# Altium PCB Bop_it.PcbDoc
Units mil, origin at the board's own origin, x right, y up, seen from the top; angles counter-clockwise.
Board outline 3205 x 3070 mil, 4 copper layers (Top Layer, Top Mid Layer, Bottom Mid Layer, Bottom Layer), stack 23.756 mil thick; 32 components, 48 nets, 167 pads, 0 vias.
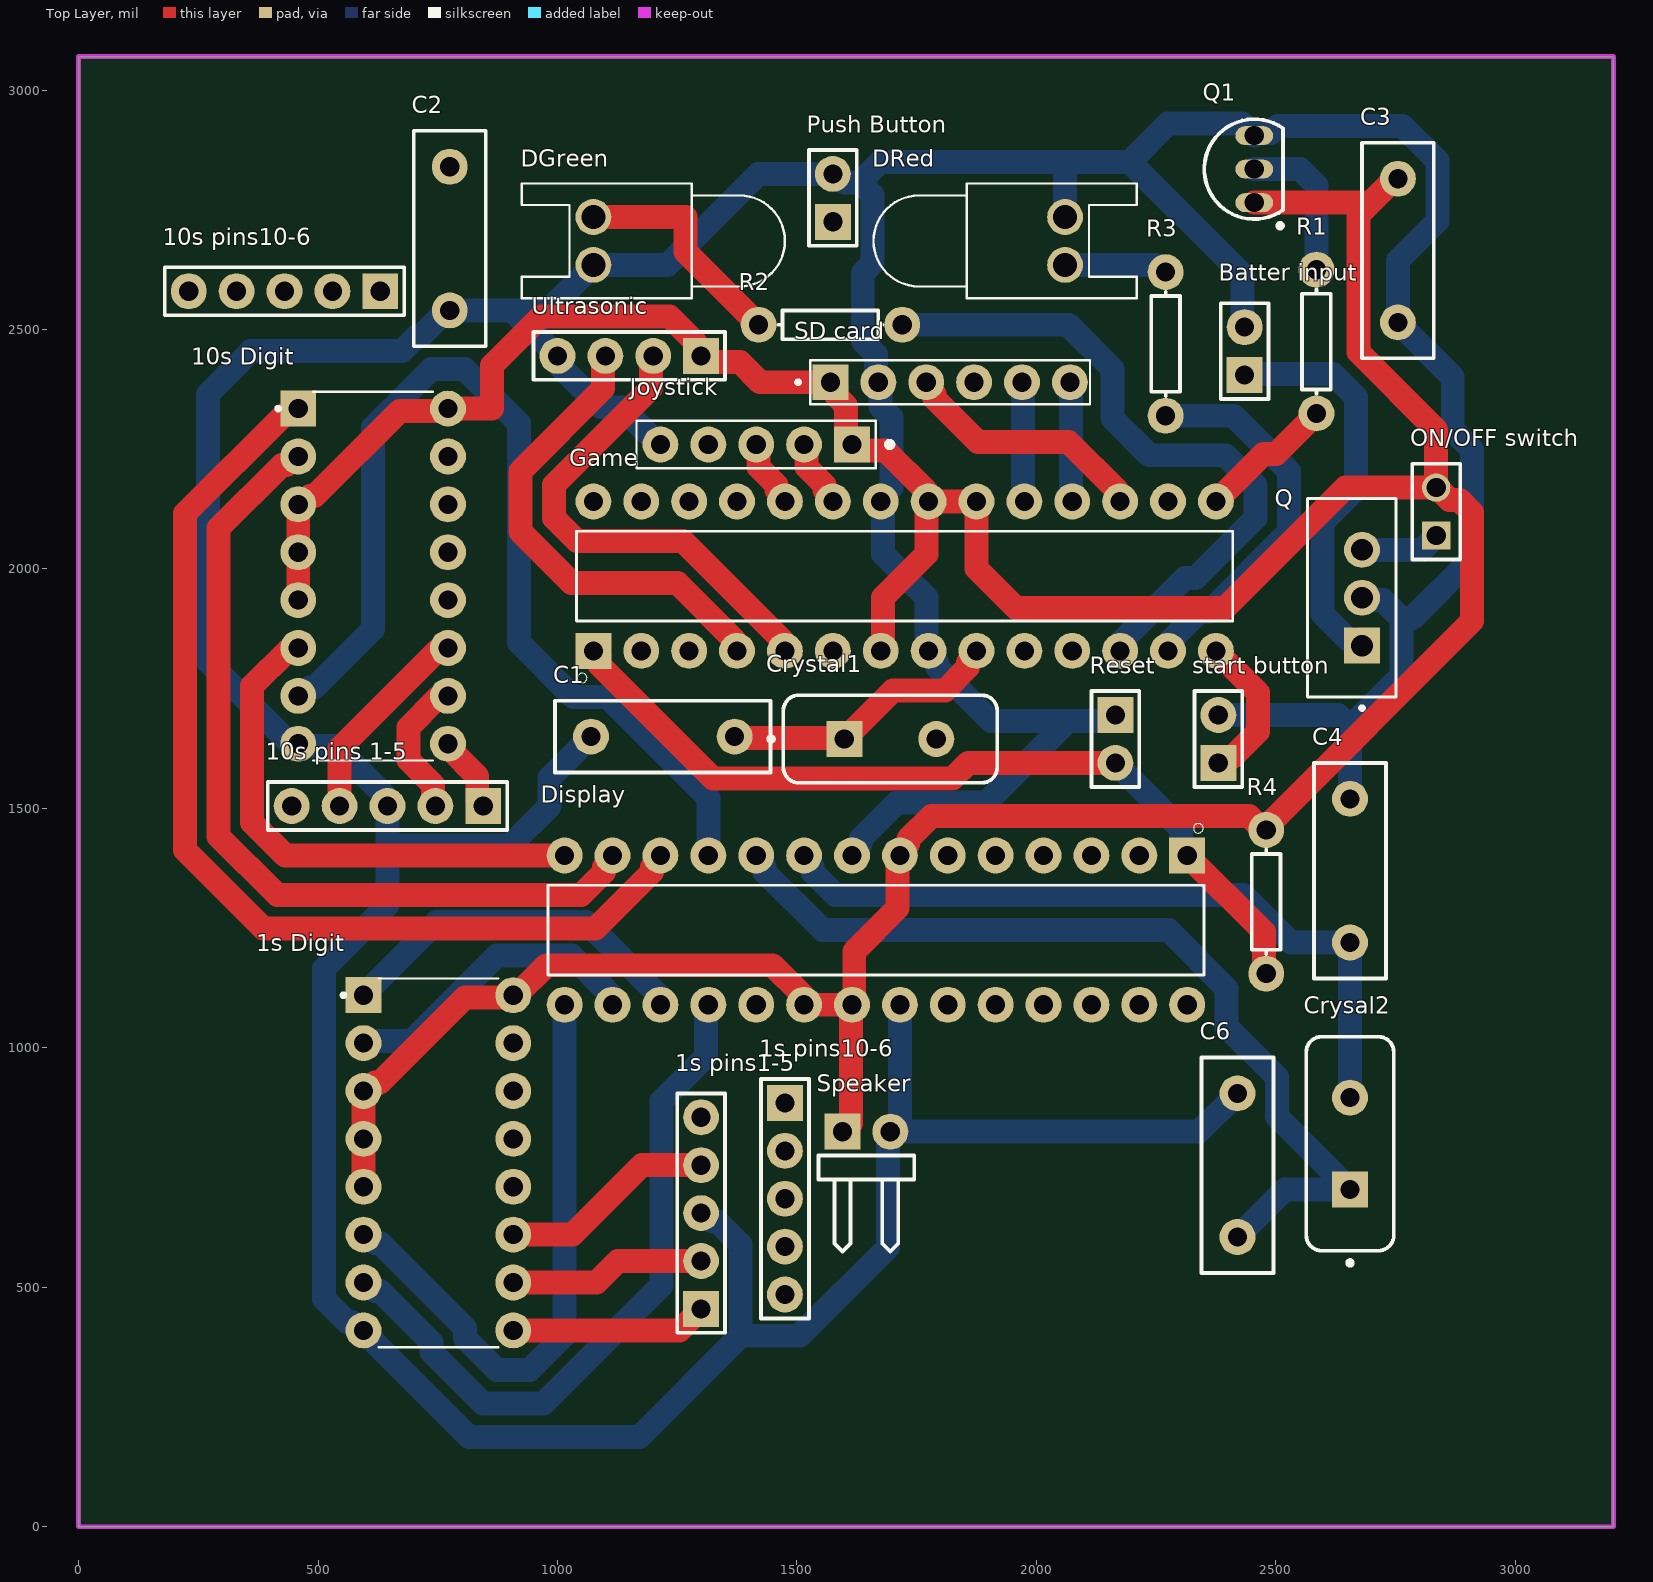
[diagram p0: Top Layer view]
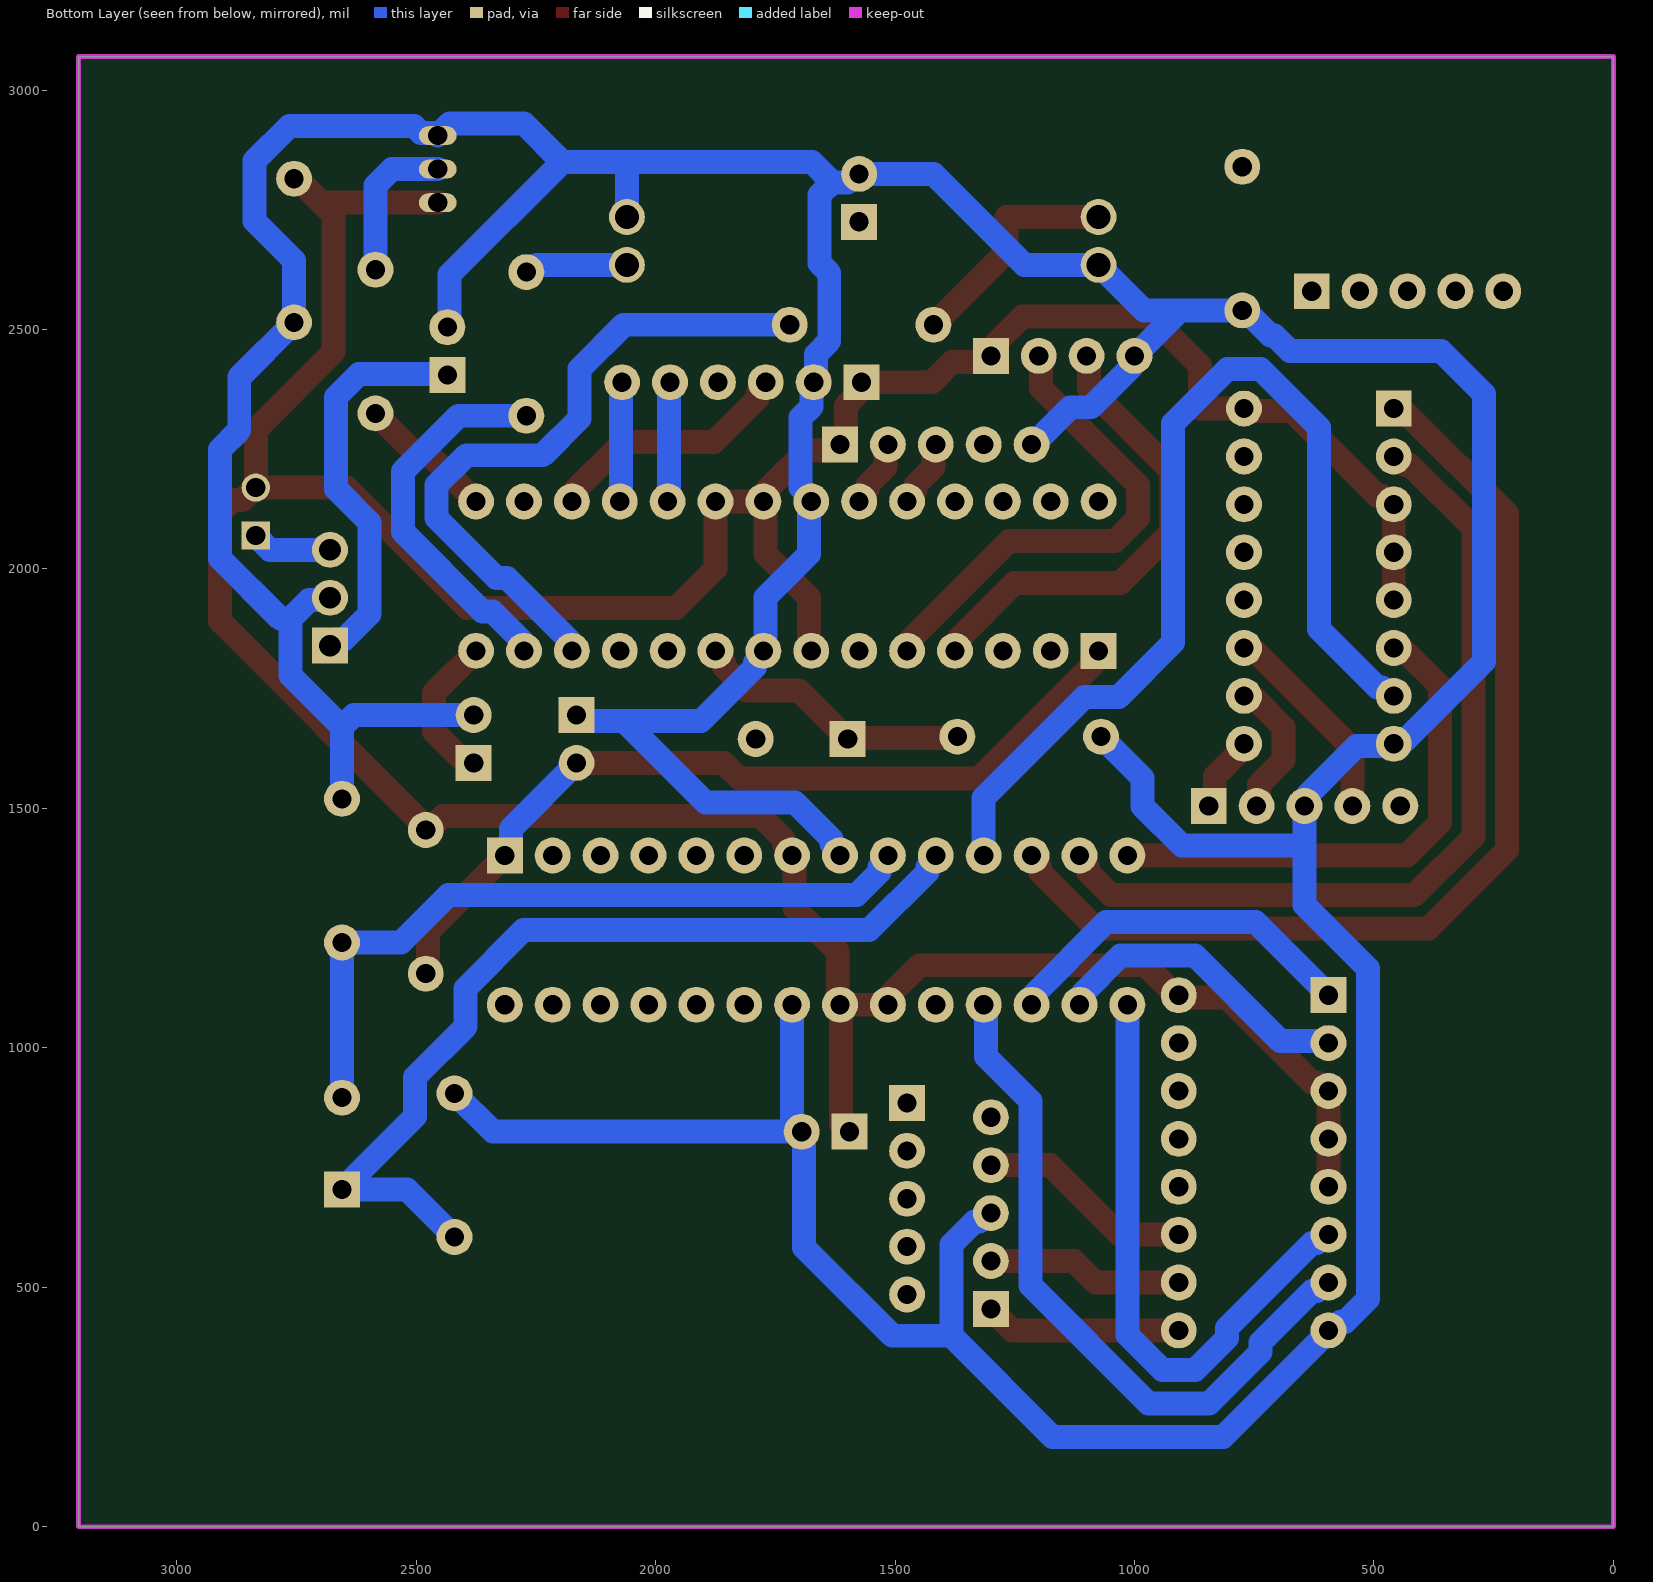
[diagram p1: Bottom Layer view, seen from below]
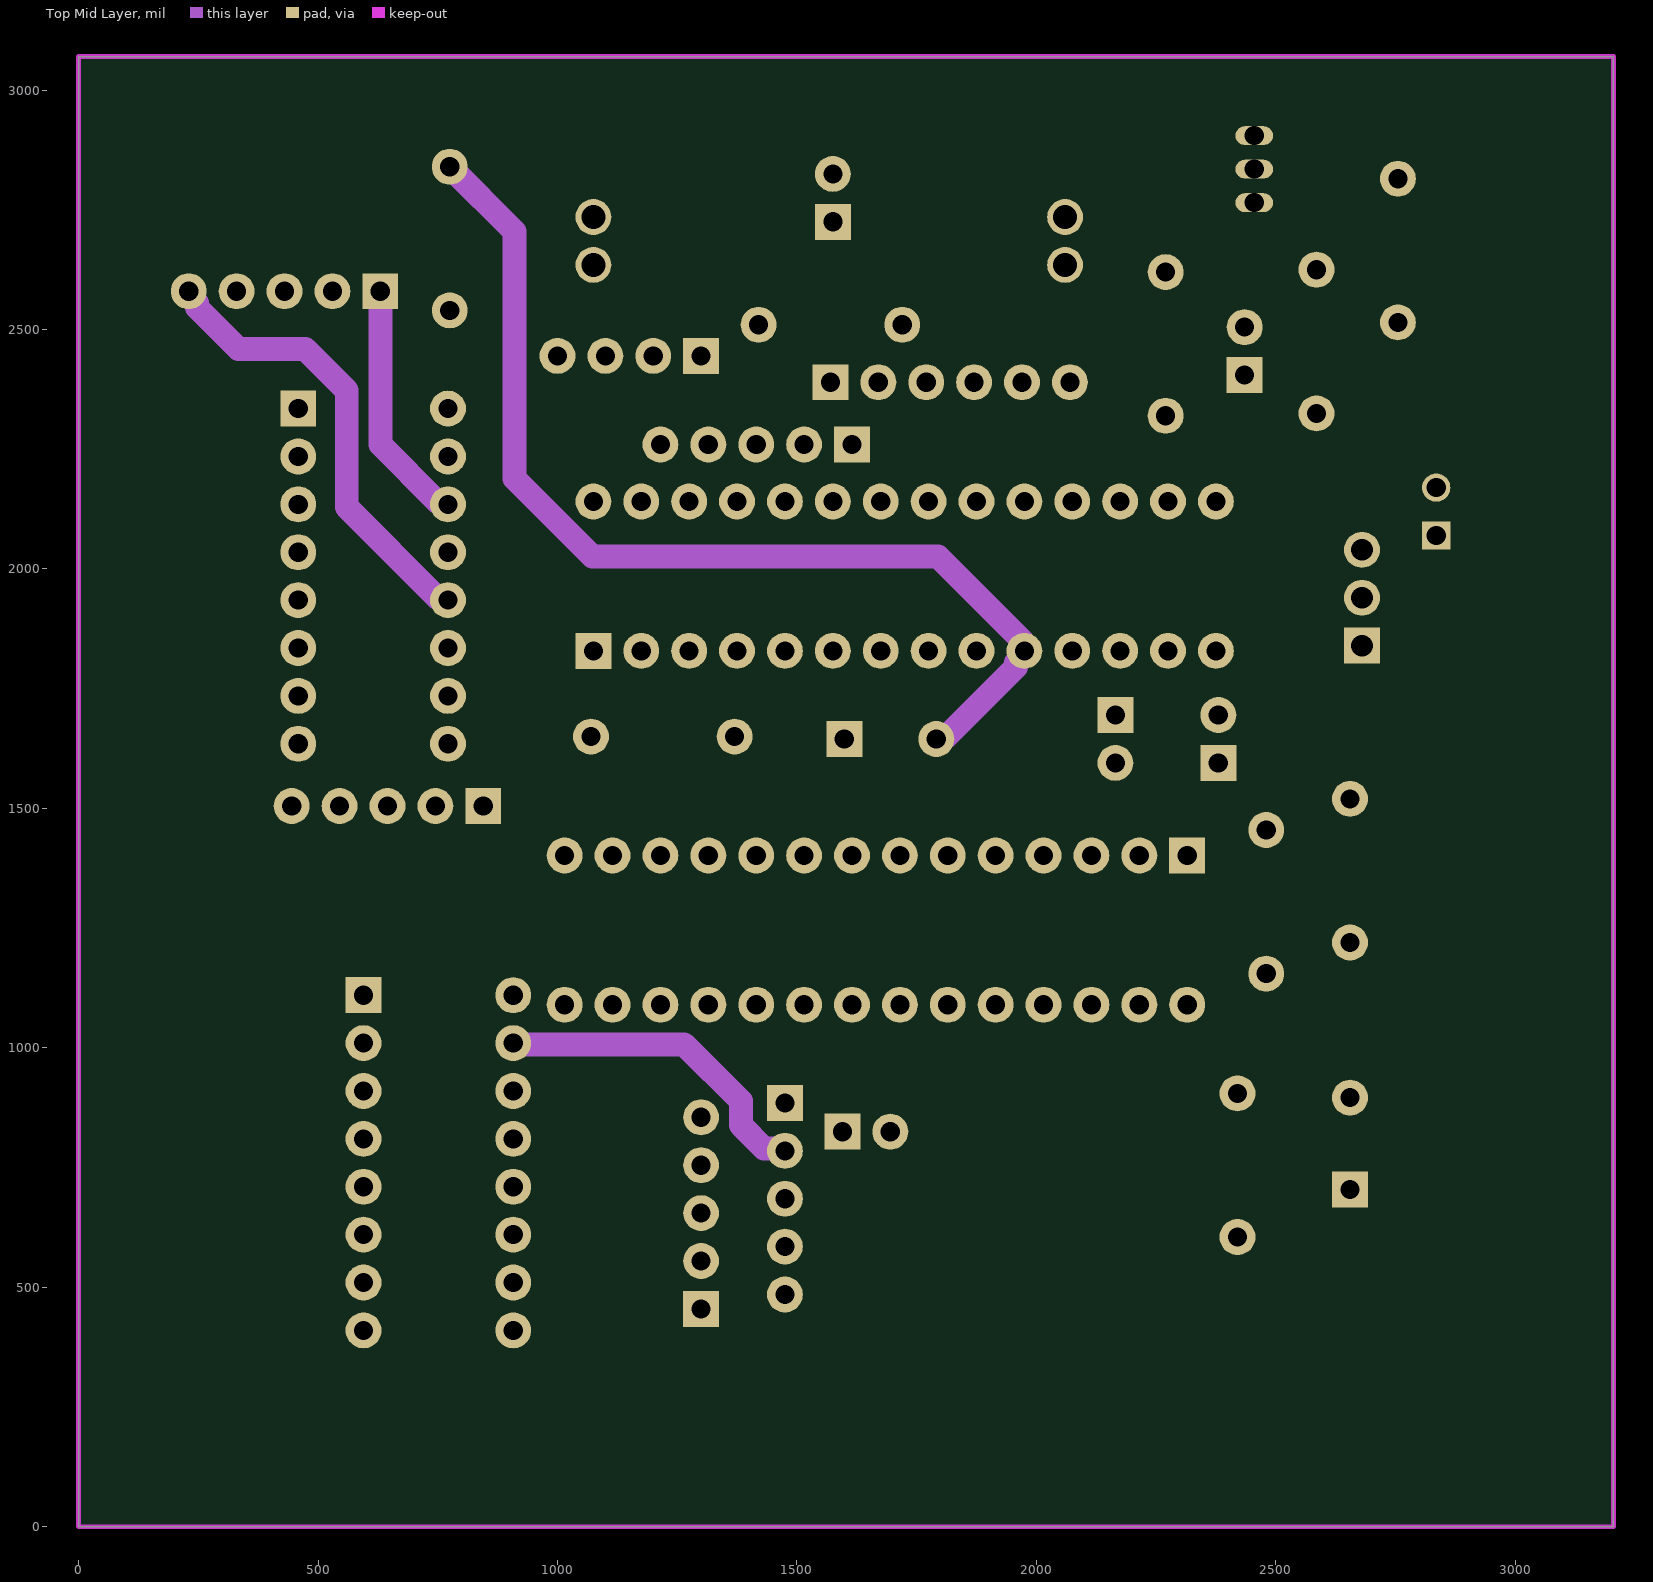
[diagram p2: Top Mid Layer]
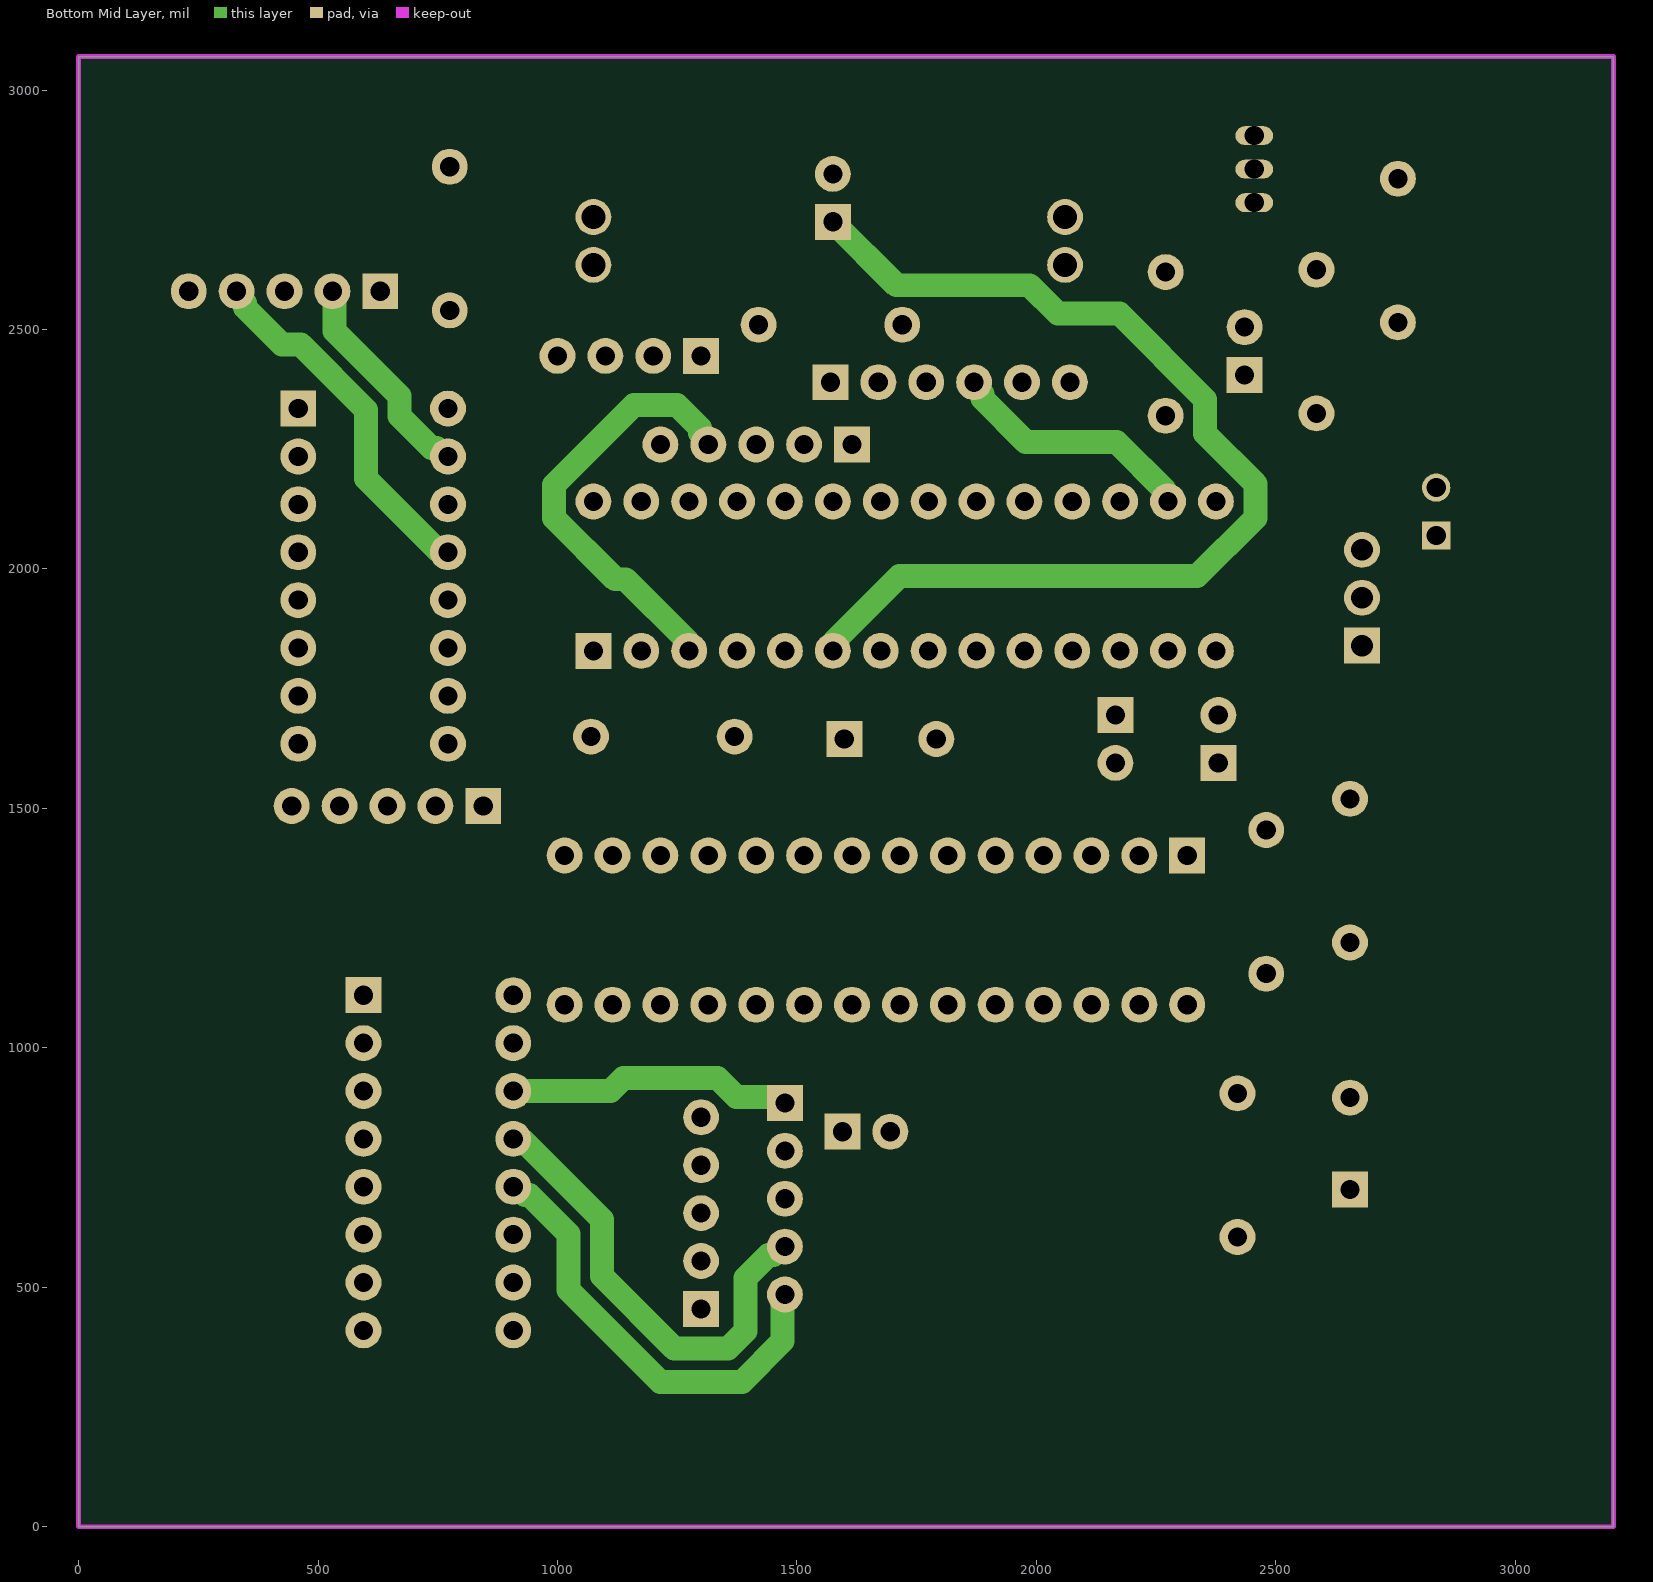
[diagram p3: Bottom Mid Layer]

## Layer stack, top to bottom
Top Solder: solder mask 0.4, Solder Resist, Dk 3.5
Top Layer: signal copper 1.4
Dielectric 2: prepreg 2.8, PP-006, Dk 4.1
Top Mid Layer: signal copper 1.378
Dielectric 1: dielectric 12.6, FR-4, Dk 4.8
Bottom Mid Layer: signal copper 1.378
Dielectric 3: prepreg 2.8, PP-006, Dk 4.1
Bottom Layer: signal copper 1.4
Bottom Solder: solder mask 0.4, Solder Resist, Dk 3.5

## Board outline
0,0 3205,0 3205,3070 0,3070

## Design rules (kind name [scope] priority, off if disabled: settings)
BoardOutlineClearance [All] p1: gap=12 ignorepadtopadclearanceinfootprint=FALSE
Clearance [All] p1: gap=20 ignorepadtopadclearanceinfootprint=TRUE except(24: Arc-Via Track-Via SMDPad-Via THPad-Via Via-Via Via-Fill Via-Poly Via-Region Via-Text Via-Hole)
DiffPairsRouting [All] p1: maxlimit=10 minlimit=7 mostfreqgap=10 toplayer_minwidth=6 toplayer_maxwidth=15 toplayer_prefwidth=8 midlayer1_mingap=10 midlayer1_minwidth=15 midlayer1_maxwidth=15 midlayer1_prefwidth=15 midlayer2_mingap=10 midlayer2_minwidth=15 midlayer2_maxwidth=15 midlayer2_prefwidth=15 bottomlayer_minwidth=6 bottomlayer_maxwidth=15 bottomlayer_prefwidth=8 maxuncoupledlength=500
HoleSize [All] p1: absolutevalues=TRUE maxlimit=1000 minlimit=39.37 maxpercent=80.000 minpercent=20.000
HoleToHoleClearance [All] p1: gap=17 allowstackedmicrovias=TRUE
PolygonConnect [All] p1: connectstyle=Relief reliefconductorwidth=10 reliefentries=4 polygonreliefangle="90 Angle" airgapwidth=10
RoutingVias [All] p1: holewidth=30 width=35 viastyle="Through Hole" minholewidth=10 minwidth=11 maxholewidth=255 maxwidth=250
SilkToSilkClearance [All] p1: silktosilkclearance=0
SolderMaskExpansion SolderMaskExpansion_1 [All] p1: expansion=4 istentingtop=FALSE
Width [All] p1: maxlimit=10000 minlimit=30 preferedwidth=50 minimp=50.000000 maximp=50.000000 favimp=50.000000
26 further rules are at their usual default settings.

## Components (designator, comment, footprint, x,y, rotation, side; value= is the part's Value field where it differs from the comment)
"1s Digit" "SN74LS247N" DIP794W45P254L1969H508Q16 751.3,760 r0 top
"1s pins1-5" "Header 5" HDR1X5 1300,455 r90 top
"1s pins10-6" "Header 5" HDR1X5 1475,885 r270 top
"10s Digit" "SN74LS247N" DIP794W45P254L1969H508Q16 615,1985 r0 top
"10s pins10-6" "Header 5" HDR1X5 630,2580 r180 top
"10s pins 1-5" "Header 5" HDR1X5 845,1505 r180 top
"Batter input" "Header 2" HDR1X2#1 2435,2405 r90 top
C1 "C1" RAD-0.3 1220,1650 r0 top value=22pF
C2 "C2" RAD-0.3 775,2690 r90 top value=22pF
C3 "Cap" RAD-0.3 2755,2665 r90 top value=10uF
C4 "C1" RAD-0.3 2655,1370 r90 top value=22pF
C6 "C5" RAD-0.3 2420,755 r90 top value=22pF
Crysal2 "FOXSLF/160-20" FOX-FOXSLF160-20 2655,800 r90 top
Crystal1 "FOXSLF/160-20" FOX-FOXSLF160-20 1695,1645 r0 top
DGreen "LED0" LED-0 1075,2685 r90 top
Display "ATMEGA328P-PU" DIP794W46P254L2967H457Q28B 1665,1245.91 r270 top
DRed "LED0" LED-0 2060,2685 r270 top
Game "ATMEGA328P-PU" DIP794W46P254L2967H457Q28B 1725,1985 r90 top
Joystick "Joystick" TE_826629-5 1615,2260 r180 top
"ON/OFF switch" "Header 2" HDR1X2#2 2835,2070 r90 top
"Push Button" "Header 2" HDR1X2#1 1575,2725 r90 top
Q "LM7805CT/NOPB" TO254P1054X470X2600-3 2680,1840 r90 top
Q1 "NPN" TO-226-AA 2455,2835 r0 top
R1 "Res1" AXIAL-0.3 2585,2475 r90 top value=n/a
R2 "Res1" AXIAL-0.3 1570,2510 r0 top value=1.2k
R3 "Res1" AXIAL-0.3 2270,2470 r270 top value=1.2k
R4 "Res1" AXIAL-0.3 2480,1305 r90 top value=10K
Reset "Header 2" HDR1X2#1 2165,1695 r270 top
"SD card" "SD Card Reader" TE_5-146285-6 1570,2390 r0 top
Speaker "Header 2H" HDR1X2H 1595,825 r0 top
"start button" "Header 2" HDR1X2#1 2380,1595 r90 top
Ultrasonic "Ultrasonic sensor" HDR1X4 1300,2445 r180 top

## Footprints (in the part's own frame and the unit in brackets; to place one, negate y for a bottom-side part, rotate by r counter-clockwise, add the part's x,y. Pads: shape width x height; smd on the part's side, far side on the other; paste and mask are expansions set on the pad)
AXIAL-0.3 [mil] "Axial Device, Thru-Hole; 2 Leads; 0.3 in Pin Spacing"
  round 75 hole 40: 1(-150,0) 2(150,0)
  silkscreen extent -109,-30 109,30
DIP794W45P254L1969H508Q16 [mil]
  rect 75x75 hole 40: 1(-156.3,350)
  round 75 hole 40: 2(-156.3,250) 3(-156.3,150) 4(-156.3,50) 5(-156.3,-50) 6(-156.3,-150) 7(-156.3,-250) 8(-156.3,-350) 9(156.3,-350) 10(156.3,-250) 11(156.3,-150) 12(156.3,-50) 13(156.3,50) 14(156.3,150) 15(156.3,250) 16(156.3,350)
  silkscreen extent -202,-385 125,385, body extent -380,-215 380,215, height 200
DIP794W46P254L2967H457Q28B [mil]
  rect 75x75 hole 40: 1(-155.91,650)
  round 75 hole 40: 2(-155.91,550) 3(-155.91,450) 4(-155.91,350) 5(-155.91,250) 6(-155.91,150) 7(-155.91,50) 8(-155.91,-50) 9(-155.91,-150) 10(-155.91,-250) 11(-155.91,-350) 12(-155.91,-450) 13(-155.91,-550) 14(-155.91,-650) 15(155.91,-650) 16(155.91,-550) 17(155.91,-450) 18(155.91,-350) 19(155.91,-250) 20(155.91,-150) 21(155.91,-50) 22(155.91,50) 23(155.91,150) 24(155.91,250) 25(155.91,350) 26(155.91,450) 27(155.91,550) 28(155.91,650)
  silkscreen extent -223,-685 94,685
FOX-FOXSLF160-20 [mil] "THD, 2-Leads, Body 11.35x4.65mm"
  rect 75x75 hole 40: 1(-96.06,0)
  round 75 hole 40: 2(96.06,0)
  silkscreen extent -254,-92 223,92, body extent -223,-92 223,92, height 142
HDR1X2#1 [mil] "Connector; Header; 2 Position"
  rect 75x75 hole 40: 1(0,0)
  round 75 hole 40: 2(100,0)
  silkscreen extent -50,-50 150,50
HDR1X2#2 [mil] "Connector; Header; 2 Position"
  rect 59.06x59.06 hole 40: 1(0,0)
  round 59.06 hole 40: 2(100,0)
  silkscreen extent -50,-50 150,50
HDR1X2H [mil] "Connector; Header; 2 Position; Right Angle"
  rect 75x75 hole 40: 1(0,0)
  round 75 hole 40: 2(100,0)
  silkscreen extent -50,-250 150,-50
HDR1X4 [mil] "Connector; Header; 4 Position"
  rect 75x75 hole 40: 1(0,0)
  round 75 hole 40: 2(100,0) 3(200,0) 4(300,0)
  silkscreen extent -50,-50 350,50
HDR1X5 [mil] "Connector; Header; 5 Position"
  rect 75x75 hole 40: 1(0,0)
  round 75 hole 40: 2(100,0) 3(200,0) 4(300,0) 5(400,0)
  silkscreen extent -50,-50 450,50
LED-0 [mil] "LED; 2 Leads"
  round 75 hole 50: 1(50,0) 2(-50,0)
  silkscreen extent -120,-400 120,150
RAD-0.3 [mil] "Radial Cap, Thru-Hole; 2 Leads; 0.3 in Pin Spacing"
  round 75 hole 40: 1(-150,0) 2(150,0)
  silkscreen extent -225,-75 225,75
TE_5-146285-6 [mil]
  rect 75x75 hole 40: 1(0,0)
  round 75 hole 40: 2(100,0) 3(200,0) 4(300,0) 5(400,0) 6(500,0)
  silkscreen extent -72,-46 542,46
TE_826629-5 [mil]
  rect 75x75 hole 40: 1(0,0)
  round 75 hole 40: 2(100,0) 3(200,0) 4(300,0) 5(400,0)
  silkscreen extent -85,-49 450,49
TO254P1054X470X2600-3 [mil]
  rect 75x75 hole 45: 1(0,0)
  round 75 hole 45: 2(100,0) 3(200,0)
  silkscreen extent -134,-71 307,114
TO-226-AA [mm] "TO, Flat Index; 3 In-Line, Axial Leads; Body Dia. 4.8mm; Leads 0.55 x 0.51 mm (max)"
  oval 2x1 hole 1.016: 1(0,-1.778) 2(0,0) 3(0,1.778)
  silkscreen extent -2.65,-3.13 1.52,2.65, body extent -2.65,-2.66 1.52,2.66, height 5.33

## Part data
"1s Digit" "10s Digit": "BCD-To-Seven-Segment Decoders/Drivers 16-PDIP 0 to 70", Package="PDIP-16 Texas Instruments", Check_prices=https://www.snapeda.com/parts/SN74LS247N/Texas%20Instruments/view-part/230215/?ref=eda, Digi-Key_Part_Number=296-28943-2-ND, MF="Texas Instruments", MP=SN74LS247N, Purchase-URL=https://pricing.snapeda.com/search/part/SN74LS247N/?ref=eda, SnapEDA_Link=https://www.snapeda.com/parts/SN74LS247N/Texas%20Instruments/view-part/230215/?ref=snap
"1s pins1-5" "1s pins10-6" "10s pins10-6" "10s pins 1-5": "Header, 5-Pin", LatestRevisionDate=17-Jul-2002, LatestRevisionNote="Re-released for DXP Platform.", Publisher="Altium Limited"
"Batter input" "ON/OFF switch" "Push Button" Reset "start button": "Header, 2-Pin", LatestRevisionDate=17-Jul-2002, LatestRevisionNote="Re-released for DXP Platform.", Publisher="Altium Limited"
C1 C2 C4 C6: library part Cap, "Capacitor", LatestRevisionDate=17-Jul-2002, LatestRevisionNote="Re-released for DXP Platform.", PackageDescription="Radial Cap, Thru-Hole; 2 Leads; 0.3 in Pin Spacing", PackageReference=RAD-0.3, Published=8-Jun-2000, Publisher="Altium Limited"
C3: "Capacitor", LatestRevisionDate=17-Jul-2002, LatestRevisionNote="Re-released for DXP Platform.", PackageDescription="Radial Cap, Thru-Hole; 2 Leads; 0.3 in Pin Spacing", PackageReference=RAD-0.3, Published=8-Jun-2000, Publisher="Altium Limited"
Crysal2 Crystal1: library part CMP-1749-00003-1, "Resistance Weld Thru-Hole Crystal, 16 MHz, -20 to 70 degC, 2-Pin THD, RoHS, Bulk", Case\Package=Axial, Max Operating Temperature="155 degC", Min Operating Temperature="-55 degC", Package Quantity=200, Power Rating="250 mW", Resistance="221 kohm", Tolerance=1%, Voltage Rating="250 V", ComponentLink1Description="Manufacturer URL", ComponentLink1URL=http://www.foxonline.com/, ComponentLink2Description=Datasheet, ComponentLink2URL=http://www.foxonline.com/pdfs/hc49slf.pdf, DatasheetVersion=Mar-15, Length="0.248 inch", Mount="Through Hole", PackageDescription="2-Pin Through Hole Device, Body 11.35 x 4.65 mm", PackageReference=FOXSLF160-20, Packaging=Bulk, RoHSCompliant=true
DGreen DRed: "Typical INFRARED GaAs LED", LatestRevisionDate=08-Jul-2005, LatestRevisionNote="Mech Layer 1 removed.", PackageDescription="LED; 2 Leads", PackageReference=LED-0, Published=8-Jun-2000, Publisher="Altium Limited"
Display Game: "AVR AVRÂ® ATmega Microcontroller IC 8-Bit 20MHz 32KB _16K x 16_ FLASH 28-PDIP", Package="PDIP-28 Atmel", Availability=Unavailable, MF=Microchip, MP=ATMEGA328P-PU, Price=None, SnapEDA_Link=https://www.snapeda.com/parts/ATMEGA328P-PU/Microchip/view-part/44282/?ref=snap
Joystick: library part 826629-5, "Board-To-Board Connector, AMPMODU MOD II Series, Through Hole, Header, 5, 2.54 mm", Package=None, Availability=Unavailable, Centerline_Pitch="2.54 mm[.1 in]", EU_RoHS_Compliance=Compliant, MF="TE Connectivity", MP=826629-5, Number_of_Positions=5, Price=None, Product_Type=Connector, SnapEDA_Link=https://www.snapeda.com/parts/826629-5/TE%20Connectivity%20AMP%20Connectors/view-part/905319/?ref=snap, TE_purchase_URL=https://www.te.com/usa-en/product-826629-5.html?te_bu=Cor&te_type=disp&te_campaign=seda_glo_cor-seda-global-disp-prtnr-fy19-seda-model-bom-cta_sma-317_1&elqCampaignId=32493
Q: "Linear Voltage Regulator IC 1 Output 1A TO-220-3", Package="TO-220 ON Semiconductor", Availability=Unavailable, MF="ON Semiconductor", MP=LM7805CT, Price=None, SnapEDA_Link=https://www.snapeda.com/parts/LM7805CT/ON%20Semiconductor/view-part/546231/?ref=snap
Q1: "NPN Bipolar Transistor", Code_JEDEC=TO-226-AA, LatestRevisionDate=17-Jul-2002, LatestRevisionNote="Re-released for DXP Platform.", PackageDescription="TO, Flat Index; 3 In-Line, Axial Leads; Body Dia. 4.8mm; Leads 0.55 x 0.51 mm (max)", PackageReference=TO-226-AA, Published=8-Jun-2000, Publisher="Altium Limited"
R1 R2 R3 R4: "Resistor", LatestRevisionDate=17-Jul-2002, LatestRevisionNote="Re-released for DXP Platform.", PackageDescription="Axial Device, Thru-Hole; 2 Leads; 0.3 in Pin Spacing", PackageReference=AXIAL-0.3, Published=8-Jun-2000, Publisher="Altium Limited"
"SD card": library part 5-146285-6, "Connector Header Through Hole 6 position 0.100 (2.54mm)", Package=None, Digi-Key_Part_Number=A122872-ND, DigiKey-Purchase-URL=https://snapeda.com/shop?store=DigiKey&id=2411669, EU_RoHS_Compliance=Compliant, MF="TE Connectivity", MP=5-146285-6, SnapEDA_Link=https://www.snapeda.com/parts/5-146285-6/TE%20Connectivity%20AMP%20Connectors/view-part/2411669/?ref=snap
Speaker: "Header, 2-Pin, Right Angle", LatestRevisionDate=17-Jul-2002, LatestRevisionNote="Re-released for DXP Platform.", Publisher="Altium Limited"
Ultrasonic: library part "Header 4", "Header, 4-Pin", LatestRevisionDate=17-Jul-2002, LatestRevisionNote="Re-released for DXP Platform.", Publisher="Altium Limited"

## Nets (pads, with @x,y where several pads share a name; then routed paths per layer and width w, separated by ;. In a path a pad name is that pad's centre, name@x,y a point inside that pad or via, vN(x,y) a via of type N, cw(c..) or ccw(c..) an arc to the next point about the centre after c; other vN are vias at no path point)
Bit0: "10s Digit.7" Display.11 | length 2144.4
  Bottom Layer w50: 458.7,1735 465.47,1735 482.97,1752.5 492.87,1752.5 615,1874.63 615,2295.37 737.13,2417.5 805.47,2417.5 919.21,2303.76 919.21,1846.24 1032.95,1732.5 1104.17,1732.5 1315,1521.67 Display.11
Bit1: "10s Digit.1" Display.12 | length 2162.9
  Top Layer w50: 458.7,2335 446.2,2322.5 429.53,2322.5 222.5,2115.47 222.5,1412.84 386.03,1249.31 1079.17,1249.31 1197.5,1367.64 1197.5,1377.55 1215,1395.05 Display.12
Bit2: "10s Digit.2" Display.13 | length 1789
  Top Layer w50: 458.7,2235 451.94,2235 434.44,2217.5 424.53,2217.5 292.5,2085.47 292.5,1441.83 415.02,1319.31 1049.17,1319.31 1097.5,1367.64 1097.5,1377.55 1115,1395.05 Display.13
bit3: "10s Digit.6" Display.14 | length 1094.9
  Top Layer w50: 458.7,1835 453.92,1830.22 437.24,1830.22 362.5,1755.47 362.5,1470.83 431.52,1401.81 Display.14
CorrectSignal: Game.12 R2.2 | length 1412.4
  Bottom Layer w50: R2.2 2066.67,2510 2158.64,2418.03 2158.64,2314.69 2235.83,2237.5 2395.08,2237.5 2457.5,2175.08 2457.5,2106.73 2332.36,1981.59 2310.83,1981.59 2179.78,1850.55 2179.78,1833.88 Game.12
gnd: "1s Digit.8" "1s pins1-5.3" "10s Digit.8" "10s pins 1-5.3" "Batter input.2" "Push Button.2" "SD card.2" "start button.2" C1.1 C2.1 C3.1 C4.2 C6.2 DGreen.2 Display.8 Display.22 DRed.2 Game.8 Game.22 Joystick.5 Q1.3 Q.2 Reset.1 Speaker.2 Ultrasonic.4 | length 13627.7
  Bottom Layer w50: C1.1 983.18,1563.18 983.18,1504.54 901.14,1422.5 657.5,1422.5 645,1435 ; Joystick.5 1211.51,2260 1133.71,2337.81 1090.52,2337.81 1004.78,2423.54 1004.78,2440.22 Ultrasonic.4 904.78,2540.22 ; 1300,655 1306.76,655 1324.26,637.5 1334.17,637.5 1382.5,589.17 1382.5,398.86 ; Display.8 1615,1408.58 1632.5,1426.08 1632.5,1435.98 1709.02,1512.5 1896.14,1512.5 2066.14,1682.5 ; Speaker.2@1715,851.76 Display.22 ; DRed.2 2060,2850 ; Reset.1 2152.5,1682.5 2066.14,1682.5 ; 2380,1695 2630.2,1695 2655,1670.2 ; C6.2 2340,825 Speaker.2 1690.22,820.22 1690.22,583.54 1505.53,398.86 1382.5,398.86 ; 2435,2505 2430.22,2509.78 2430.22,2614.78 2195,2850 ; C4.2 2655,1670.2 ; Q.2 2684.78,1935.22 2723.42,1935.22 2762.5,1896.14 ; 645,1435 645,1505 640.22,1509.78 640.22,1526.46 536.46,1630.22 463.48,1630.22 458.7,1635 453.92,1639.78 437.24,1639.78 270,1807.03 270,2365 360,2455 675.55,2455 708.05,2487.5 715.73,2487.5 773.24,2545 780,2545 784.78,2540.22 904.78,2540.22 ; 645,1435 645,1298.64 512.5,1166.14 512.5,475.83 560.83,427.5 570.74,427.5 588.24,410 595,410 595,407.94 815.44,187.5 1171.14,187.5 1382.5,398.86 ; 904.78,2540.22 980.22,2540.22 DGreen.2 1230,2635 1420,2825 1575,2825 1581.76,2825 1599.26,2807.5 1631.14,2807.5 ; 1631.14,2807.5 1657.5,2781.14 1657.5,2638.48 1637.5,2618.48 1637.5,2475.83 1665.22,2448.11 1665.22,2394.78 1670,2390 1674.78,2385.22 1674.78,2338.86 1697.5,2316.14 1697.5,2170.17 1675,2147.67 Game.22 1679.78,2136.12 1679.78,2031.08 1770.22,1940.64 1770.22,1833.88 Game.8 1775,1822.33 1792.5,1804.83 1792.5,1794.92 1904.92,1682.5 2066.14,1682.5 ; 1631.14,2807.5 1673.64,2850 2060,2850 ; 2060,2850 2195,2850 ; 2195,2850 2275,2930 2430,2930 Q1.3 2460.32,2910.32 2490.32,2910.32 2505,2925 2765,2925 2837.5,2852.5 2837.5,2726.72 2755,2644.22 C3.1 2869.53,2400.47 2869.53,2289.8 2909.53,2249.8 2909.53,2021.83 2783.83,1896.14 2762.5,1896.14 ; 2655,1670.2 2762.5,1777.7 2762.5,1896.14
IncorrectSignal: Game.13 R3.2 | length 803.9
  Bottom Layer w50: R3.2@2274.78,2315.22 R3.2 2411.57,2320 2527.5,2204.07 2527.5,2077.74 2361.36,1911.59 2340.83,1911.59 2279.78,1850.55 2279.78,1833.88 Game.13
MISO: "SD card.6" Game.18 | length 251.2
  Bottom Layer w50: 2070,2390 2072.5,2387.5 2072.5,2143.41 Game.18
MOSI: "SD card.3" Game.17 | length 527.7
  Top Layer w50: 1770,2390 1770,2383.24 1787.5,2365.74 1787.5,2355.83 1877.87,2265.45 2067.13,2265.45 2170.22,2162.36 2170.22,2145.69 Game.17
"Net1s Digit_1": "1s Digit.1" Display.17 | length 764.4
  Bottom Layer w50: 595,1110 747.5,1262.5 1059.17,1262.5 1210.22,1111.46 1210.22,1094.78 Display.17
"Net1s Digit_2": "1s Digit.2" Display.16 | length 647.8
  Bottom Layer w50: 595,1010 599.78,1014.78 695.71,1014.78 873.43,1192.5 1029.17,1192.5 1110.22,1111.46 1110.22,1094.78 Display.16
"Net1s Digit_6": "1s Digit.6" Display.15 | length 1268.8
  Bottom Layer w50: 595,610 601.76,610 619.26,592.5 629.17,592.5 806.8,414.87 806.8,394.12 873.43,327.5 941.77,327.5 1015,400.73 Display.15
"Net1s Digit_7": "1s Digit.7" Display.18 | length 1467
  Bottom Layer w50: 595,510 601.76,510 619.26,492.5 629.17,492.5 736.8,384.87 736.8,365.13 844.43,257.5 970.77,257.5 1217.5,504.23 1217.5,889.17 1310.22,981.89 1310.22,1085.22 Display.18
"Net1s Digit_9": "1s Digit.9" "1s pins1-5.1" | length 411
  Top Layer w50: 907.6,410 1255,410 1300,455
"Net1s Digit_10": "1s Digit.10" "1s pins1-5.2" | length 411
  Top Layer w50: 907.6,510 1081.3,510 1126.3,555 1300,555
"Net1s Digit_11": "1s Digit.11" "1s pins1-5.4" | length 452.5
  Top Layer w50: 907.6,610 1031.3,610 1176.3,755 1300,755
"Net1s Digit_12": "1s Digit.12" "1s pins10-6.5" | length 934.5
  Bottom Mid Layer w50: 907.6,710 914.36,710 931.86,692.5 941.77,692.5 1022.82,611.46 1022.82,494.55 1214.87,302.5 1385.13,302.5 1470.22,387.58 1470.22,480.22 1475,485
"Net1s Digit_13": "1s Digit.13" "1s pins10-6.4" | length 970.3
  Bottom Mid Layer w50: 907.6,810 912.38,805.22 929.05,805.22 1092.82,641.46 1092.82,523.54 1243.86,372.5 1356.14,372.5 1392.5,408.86 1392.5,519.17 1440.83,567.5 1450.74,567.5 1468.24,585 1475,585
"Net1s Digit_14": "1s Digit.14" "1s pins10-6.1" | length 600.5
  Bottom Mid Layer w50: 907.6,910 1110.52,910 1138.02,937.5 1334.17,937.5 1374.17,897.5 1462.5,897.5 1475,885
"Net1s Digit_15": "1s Digit.15" "1s pins10-6.2" | length 690.1
  Top Mid Layer w50: 907.6,1010 910.1,1007.5 1264.17,1007.5 1382.87,888.8 1382.87,838.49 1431.58,789.78 1470.22,789.78 1475,785
"Net10s Digit_9": "10s Digit.9" "10s pins 1-5.1" | length 160.5
  Top Layer w50: 771.3,1635 771.3,1628.24 832.5,1567.03 832.5,1517.5 845,1505
"Net10s Digit_10": "10s Digit.10" "10s pins 1-5.2" | length 297.2
  Top Layer w50: 745,1505 740.22,1509.78 740.22,1549.41 688.8,1600.83 688.8,1669.17 749.84,1730.22 766.52,1730.22 771.3,1735
"Net10s Digit_11": "10s Digit.11" "10s pins 1-5.4" | length 433.5
  Top Layer w50: 545,1505 545,1625.37 749.84,1830.22 766.52,1830.22 771.3,1835
"Net10s Digit_12": "10s Digit.12" "10s pins10-6.5" | length 960.4
  Top Mid Layer w50: 230,2580 230,2573.24 247.5,2555.74 247.5,2545.83 334.24,2459.08 473.26,2459.08 560,2372.34 560,2129.63 749.84,1939.78 766.52,1939.78 771.3,1935
"Net10s Digit_13": "10s Digit.13" "10s pins10-6.4" | length 760.4
  Bottom Mid Layer w50: 330,2580 330,2573.24 347.5,2555.74 347.5,2545.83 424.84,2468.48 463.86,2468.48 600.49,2331.85 600.49,2189.13 749.84,2039.78 766.52,2039.78 771.3,2035
"Net10s Digit_14": "10s Digit.14" "10s pins10-6.1" | length 513.3
  Top Mid Layer w50: 630,2580 630,2259.63 749.84,2139.78 766.52,2139.78 771.3,2135
"Net10s Digit_15": "10s Digit.15" "10s pins10-6.2" | length 454.7
  Bottom Mid Layer w50: 530,2580 534.78,2575.22 534.78,2496.55 670.49,2360.84 670.49,2319.13 737.13,2252.5 747.03,2252.5 764.53,2235 771.3,2235
"NetBatter input_1": "Batter input.1" Q.1 | length 845.7
  Bottom Layer w50: 2435,2405 2437.5,2407.5 2619.17,2407.5 2667.5,2359.17 2667.5,2167.5 2597.5,2097.5 2597.5,1905.83 2650.83,1852.5 2667.5,1852.5 Q.1
NetC1_2: C1.2 Crystal1.1 Game.9 | length 593.1
  Top Layer w50: C1.2 1372.5,1647.5 1596.44,1647.5 Crystal1.1 1700.53,1746.59 1809.17,1746.59 1857.5,1794.92 1857.5,1804.83 1875,1822.33 Game.9
NetC2_2: C2.2 Crystal1.2 Game.10 | length 2216.9
  Top Layer w50: C2.2@773.03,2838.03 C2.2 ; Crystal1.2 Crystal1.2@1797.83,1645 ; Game.10@1970.22,1824.31 Game.10
  Top Mid Layer w50: C2.2 910.31,2704.69 910.31,2188.93 1073.14,2026.1 1794.67,2026.1 1970.22,1850.55 1970.22,1833.88 Game.10 1975,1822.33 1957.5,1804.83 1957.5,1794.92 1812.36,1649.78 1795.85,1649.78 Crystal1.2
NetC4_1: C4.1 Crysal2.2 Display.9 | length 1549
  Bottom Layer w50: Display.9 1515,1395.05 1532.5,1377.55 1532.5,1367.64 1580.83,1319.31 2432.36,1319.31 2531.67,1220 C4.1 Crysal2.2
NetC6_1: C6.1 Crysal2.1 Display.10 | length 1910.1
  Bottom Layer w50: Display.10 1415,1395.05 1432.5,1377.55 1432.5,1367.64 1554.23,1245.91 2275.77,1245.91 2397.5,1124.17 2397.5,1044.17 2502.5,939.17 2502.5,856.44 Crysal2.1 2518.94,703.94 C6.1
NetDGreen_1: DGreen.1 R2.1 | length 480.7
  Top Layer w50: DGreen.1 1267.5,2735 1267.5,2662.5 R2.1
NetDRed_1: DRed.1 R3.1 | length 216.2
  Bottom Layer w50: DRed.1 2248.24,2635 2263.24,2620 R3.1
NetGame_4: Game.4 Ultrasonic.3 | length 1006
  Top Layer w50: Ultrasonic.3 1095.22,2440.22 1095.22,2376.79 922.5,2204.07 922.5,2077.74 1029.74,1970.5 1250.26,1970.5 1370.22,1850.55 1370.22,1833.88 Game.4
NetGame_5: Game.5 Ultrasonic.2 | length 1031.5
  Top Layer w50: Ultrasonic.2 1195.22,2440.22 1195.22,2377.79 992.5,2175.08 992.5,2106.73 1040.83,2058.41 1262.36,2058.41 1470.22,1850.55 1470.22,1833.88 Game.5
NetGame_6: "Push Button.1" Game.6 | length 2234.7
  Bottom Mid Layer w50: Game.6 1579.78,1833.88 1579.78,1850.55 1714.23,1985 2335.77,1985 2457.5,2106.73 2457.5,2177.95 2352.5,2282.95 2352.5,2354.17 2173.34,2533.34 2044.99,2533.34 1985.83,2592.5 1707.5,2592.5 1575,2725
  Bottom Layer w50: Game.6 1579.09,1829.09 Game.6@1580,1830
NetGame_14: "start button.1" Game.14 | length 318.4
  Top Layer w50: Game.14@2375,1825 Game.14 2462.5,1741.59 2462.5,1660.83 2409.17,1607.5 2392.5,1607.5 2380,1595
NetGame_15: Game.15 R1.1 | length 286.3
  Top Layer w50: Game.15 2474.09,2240 2500,2240 R1.1
"NetON/OFF switch_1": "ON/OFF switch.1" Q.3 | length 167.4
  Bottom Layer w50: Q.3 2805,2040 2835,2070
NetQ1_2: Q1.2 R1.2 | length 319.9
  Bottom Layer w50: Q1.2 2550.71,2835 2585,2800.71 R1.2
Reset: Display.1 Game.1 R4.1 Reset.2 | length 1800.9
  Top Layer w50: Game.1 1087.5,1816.59 1087.5,1799.92 1324.92,1562.5 1825.24,1562.5 1857.74,1595 Reset.2 Reset.2@2160.22,1599.78 ; Display.1 2475.22,1241.59 2475.22,1159.78 R4.1
  Bottom Layer w50: Reset.2 2302.5,1457.5 2302.5,1414.31 Display.1
SCK: "SD card.5" Game.19 | length 251.2
  Bottom Layer w50: 1970,2390 1972.5,2387.5 1972.5,2143.41 Game.19
SEL: Game.3 Joystick.4 | length 911.4
  Bottom Mid Layer w50: Game.3 1270.22,1833.88 1270.22,1850.55 1142.13,1978.64 1120.59,1978.64 992.5,2106.73 992.5,2175.08 1159.92,2342.5 1249.17,2342.5 1297.5,2294.17 1297.5,2284.26 1315,2266.76 Joystick.4
SS: "SD card.4" Game.16 | length 541.2
  Top Layer w50: 1870,2390 1870,2396.76 ; Game.16@2270.22,2145.69 Game.16
  Bottom Mid Layer w50: 1870,2390 1870,2383.24 1887.5,2365.74 1887.5,2355.83 1977.87,2265.45 2167.13,2265.45 2270.22,2162.36 2270.22,2145.69 Game.16
Vcc: "1s Digit.3" "1s Digit.4" "1s Digit.5" "1s Digit.16" "10s Digit.3" "10s Digit.4" "10s Digit.5" "10s Digit.16" "ON/OFF switch.2" "SD card.1" C3.2 Display.7 Display.20 Display.21 Game.7 Game.20 Game.21 Joystick.1 Q1.1 R4.2 Speaker.1 Ultrasonic.1 | length 8403.4
  Top Layer w50: 458.7,1935 458.7,2035 458.7,2135 465.47,2135 482.97,2152.5 492.87,2152.5 670.59,2330.22 766.52,2330.22 771.3,2335 863.33,2335 863.33,2425 965.83,2527.5 1234.17,2527.5 1287.5,2474.17 1287.5,2457.5 Ultrasonic.1 1312.5,2432.5 1380.83,2432.5 1423.33,2390 1570,2390 1582.5,2377.5 1582.5,2360.83 1602.5,2340.83 1602.5,2272.5 Joystick.1 1627.5,2247.5 1685.08,2247.5 1770.22,2162.36 1770.22,2145.69 Game.21 ; 595,710 595,810 595,910 601.76,910 619.26,927.5 629.17,927.5 806.89,1105.22 902.81,1105.22 907.6,1110 914.36,1110 976.86,1172.5 1449.17,1172.5 1510.22,1111.46 1510.22,1094.78 Display.20 Display.21 ; Speaker.1 1612.5,842.5 1612.5,1087.5 Display.21 ; Game.7 1679.78,1833.88 1679.78,1940.64 1770.22,2031.08 1770.22,2136.12 Game.21 ; Q1.1 2698.24,2765 ; C3.2 2748.24,2815 2698.24,2765 ; Display.21 1619.78,1094.78 1619.78,1201.55 1710.22,1291.98 1710.22,1397.03 Display.7 1715,1408.58 1732.5,1426.08 1732.5,1435.98 1780.83,1484.31 2443.92,1484.31 2473.24,1455 R4.2 2480,1461.67 2909.53,1891.2 2909.53,2118.17 2883.17,2144.53 2862.92,2144.53 2837.45,2170 2835,2170 ; Game.21 Game.20 1875,2001.21 1957.71,1918.5 2394.17,1918.5 2645.67,2170 2835,2170 ; 2698.24,2765 2672.5,2739.26 2672.5,2453.17 2835,2290.67 2835,2170
XOUT: Game.23 Joystick.2 | length 143.9
  Top Layer w50: Joystick.2 1519.78,2255.22 1519.78,2212.79 1557.5,2175.08 1557.5,2165.17 1575,2147.67 Game.23
YOUT: Game.24 Joystick.3 | length 143.9
  Top Layer w50: Joystick.3 1419.78,2255.22 1419.78,2212.79 1457.5,2175.08 1457.5,2165.17 1475,2147.67 Game.24
pads on no net: "1s pins1-5.5" "1s pins10-6.3" "10s pins10-6.3" "10s pins 1-5.5" Display.2 Display.3 Display.4 Display.5 Display.6 Display.19 Display.23 Display.24 Display.25 Display.26 Display.27 Display.28 Game.2 Game.11 Game.25 Game.26 Game.27 Game.28

## Keep-outs
Keep-Out Layer:
  the board outline again, w10